# Altium PCB MK2.PcbDoc (part 1 of 7)
Units mil, origin at the board's own origin, x right, y up, seen from the top; angles counter-clockwise.
Board outline 3950 x 3965 mil, 2 copper layers (Top Layer, Bottom Layer); 19 components, 37 nets, 113 pads, 8 vias.
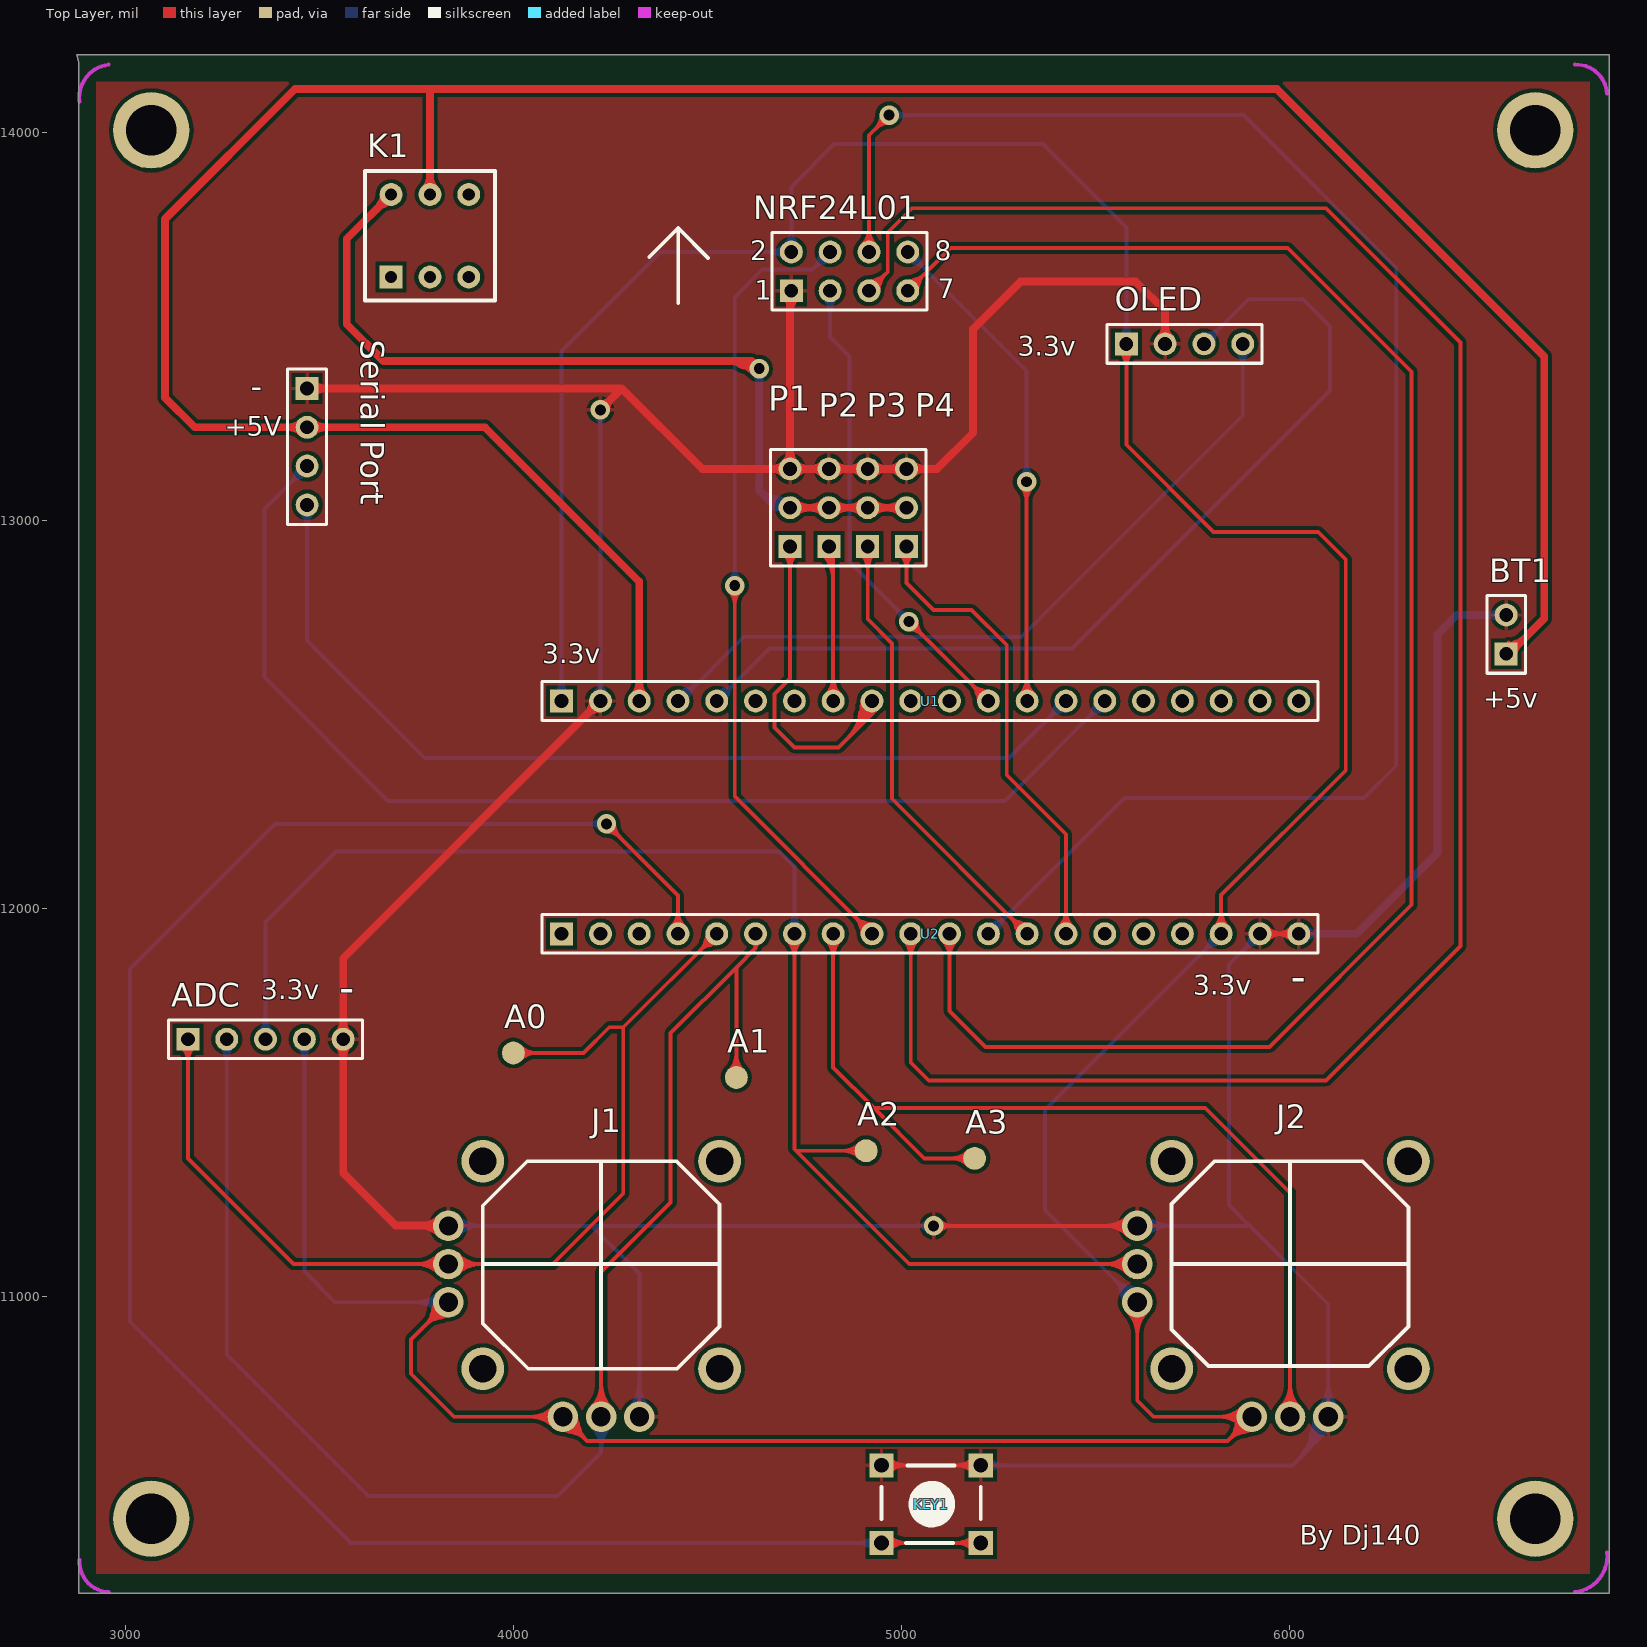
[diagram p0: Top Layer view]
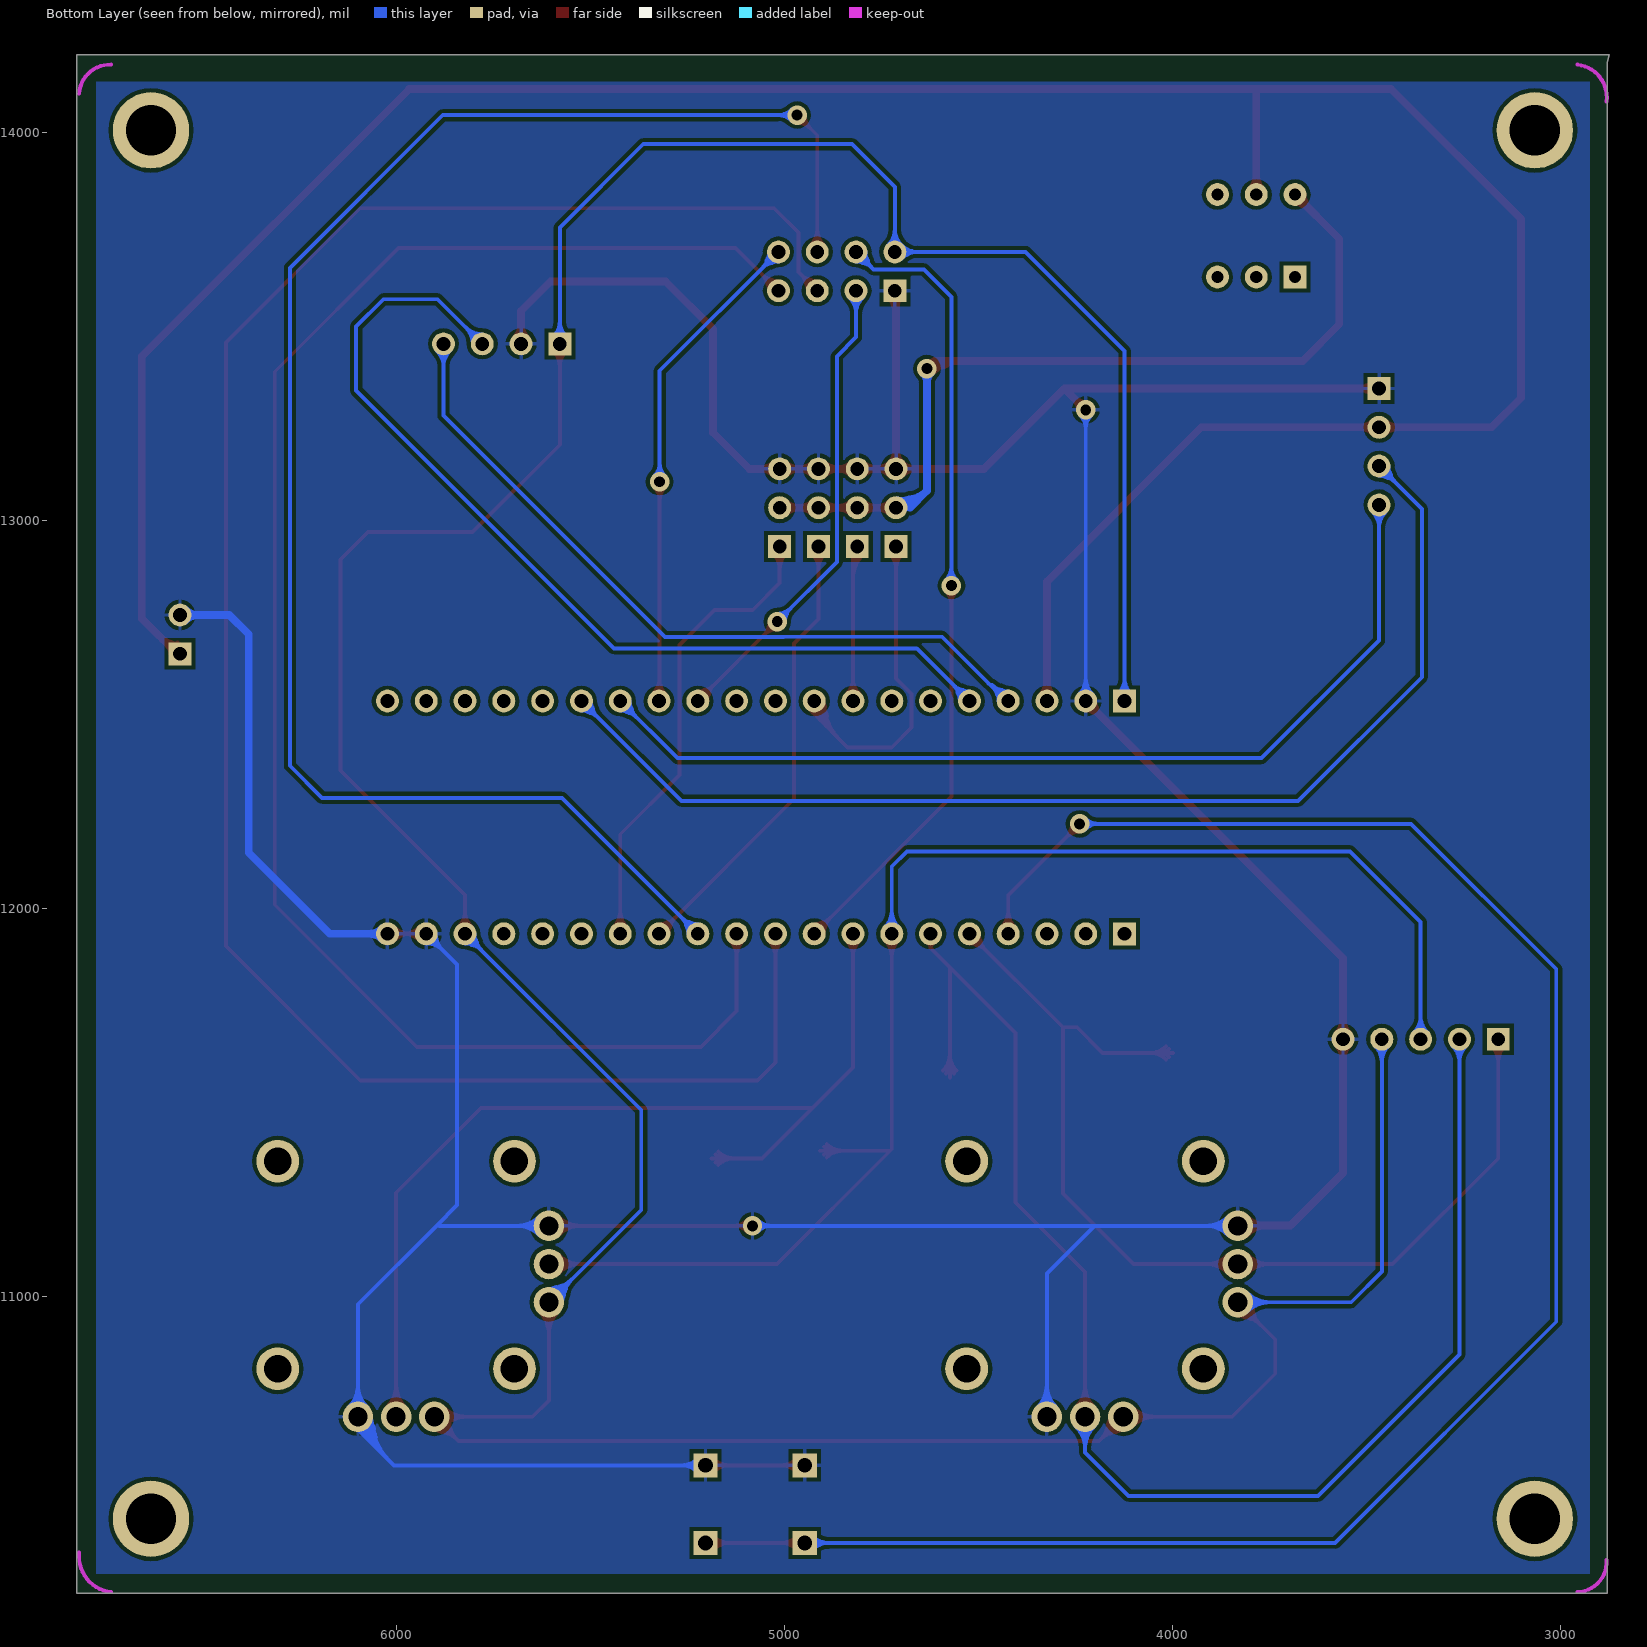
[diagram p1: Bottom Layer view, seen from below]

## Layer stack, top to bottom
Top Layer: signal copper 1.4
Dielectric: dielectric 12.6, FR-4, Dk 4.8
Bottom Layer: signal copper 1.4

## Board outline
2880,14180 2880,10235 6825,10235 6825,14200 2875,14200

## Design rules (kind name [scope] priority, off if disabled: settings)
Clearance [All] p1: gap=10
HoleSize [All] p1: absolutevalues=TRUE maxlimit=500 minlimit=1 maxpercent=80.000 minpercent=20.000
PolygonConnect [All] p1: connectstyle=Relief reliefconductorwidth=10 reliefentries=4 polygonreliefangle="90 Angle"
RoutingVias [All] p1: holewidth=28 width=50 viastyle="Through Hole" minholewidth=28 minwidth=50 maxholewidth=28 maxwidth=50
SilkscreenOverComponentPads [All] p1: minsilkscreentomaskgap=10
SolderMaskExpansion [All] p1: expansion=4
Width [All] p1: maxlimit=20 minlimit=10 preferedwidth=10
26 further rules are at their usual default settings.

## Components (designator, comment, footprint, x,y, rotation, side; value= is the part's Value field where it differs from the comment)
A0 "TEST POINT" TP-1.5 4000.04,11627.36 r0 top
A1 "TEST POINT" TP-1.5 4574.84,11564.37 r90 top
A2 "TEST POINT" TP-1.5 4909.49,11375.39 r90 top
A3 "TEST POINT" TP-1.5 5189.02,11355.71 r90 top
ADC "Header 5" HDR1X5 3161.46,11662.8 r0 top (schematic designator P8)
BT1 "VBAT" BAT-2 6559.09,12706.1 r90 top
J1 "油门摇杆" 摇杆2 4291.38,11253.35 r270 top
J2 "方向摇杆" 摇杆2 6066.97,11253.35 r270 top
K1 "BUTTON" BTN8.5*8.5 3685.08,13627.36 r90 top
KEY1 "KEY_L" KEY_M 4948.86,10564.37 r0 top
NRF24L01 "Header 4X2" HDR2X4 4716.57,13591.93 r0 top (schematic designator P7)
OLED "Header 4" HDR1X4 5580,13455 r0 top (schematic designator P10)
P1 "Header 3" HDR1X3 4713.43,12932.8 r90 top
P2 "Header 3" HDR1X3 4813.43,12932.8 r90 top
P3 "Header 3" HDR1X3 4913.43,12932.8 r90 top
P4 "Header 3" HDR1X3 5013.43,12932.8 r90 top
"Serial Port" "Header 4" HDR1X4 3468.54,13339.96 r270 top (schematic designator P9)
U1 "Header 20" HDR1X20 4124.45,12534.45 r0 top
U2 "Header 20" HDR1X20 4124.45,11934.45 r0 top locked

## Footprints (in the part's own frame and the unit in brackets; to place one, negate y for a bottom-side part, rotate by r counter-clockwise, add the part's x,y. Pads: shape width x height; smd on the part's side, far side on the other; paste and mask are expansions set on the pad)
BAT-2 [mm]
  rect 1.5x1.5 hole 0.9: 1(-1.27,0)
  round 1.5 hole 0.9: 2(1.27,0)
  silkscreen extent -2.54,-1.27 2.54,1.27
BTN8.5*8.5 [mm]
  rect 1.5x1.5 hole 0.8: 1(0,0)
  round 1.5 hole 0.8: 2(0,-2.54) 3(0,-5.08) 4(5.4,-5.08) 5(5.4,-2.54) 6(5.4,0)
  silkscreen extent -1.55,-6.79 6.95,1.71
HDR1X3 [mm] "Connector; Header; 3 Position"
  rect 1.5x1.5 hole 0.9: 1(0,0)
  round 1.5 hole 0.9: 2(2.54,0) 3(5.08,0)
  silkscreen extent -1.27,-1.27 6.35,1.27
HDR1X4 [mm] "Connector; Header; 4 Position"
  rect 1.5x1.5 hole 0.9: 1(0,0)
  round 1.5 hole 0.9: 2(2.54,0) 3(5.08,0) 4(7.62,0)
  silkscreen extent -1.27,-1.27 8.89,1.27
HDR1X5 [mm] "Connector; Header; 5 Position"
  rect 1.5x1.5 hole 0.9: 1(0,0)
  round 1.5 hole 0.9: 2(2.54,0) 3(5.08,0) 4(7.62,0) 5(10.16,0)
  silkscreen extent -1.27,-1.27 11.43,1.27
HDR1X20 [mm] "Connector; Header; 20 Position"
  rect 1.5x1.5 hole 0.9: 1(0,0)
  round 1.5 hole 0.9: 2(2.54,0) 3(5.08,0) 4(7.62,0) 5(10.16,0) 6(12.7,0) 7(15.24,0) 8(17.78,0) 9(20.32,0) 10(22.86,0) 11(25.4,0) 12(27.94,0) 13(30.48,0) 14(33.02,0) 15(35.56,0) 16(38.1,0) 17(40.64,0) 18(43.18,0) 19(45.72,0) 20(48.26,0)
  silkscreen extent -1.27,-1.27 49.53,1.27
HDR2X4 [mm] "Connector; Header; 4x2 Position"
  rect 1.5x1.5 hole 0.9: 1(0,0)
  round 1.5 hole 0.9: 2(0,2.54) 3(2.54,0) 4(2.54,2.54) 5(5.08,0) 6(5.08,2.54) 7(7.62,0) 8(7.62,2.54)
  silkscreen extent -1.27,-1.27 8.89,3.81
KEY_M [mil]
  rect 62x62 hole 38: 1(0,0) 1(255.91,0) 2(0,-200) 2(255.91,-200)
  silkscreen extent 0,-200 256,0
TP-1.5 [mm]
  round 1.5 smd: 1(0,0)
摇杆2 [mm]
  round 2.8 hole 1.8: 0(-2.413,6.102) 0(-2.413,-9.398) 0(11.176,6.102) 0(11.176,-9.398)
  round 2 hole 1.25: 1(14.318,0.849) 2(14.318,-1.651) 3(14.318,-4.151) 4(6.818,-11.651) 5(4.318,-11.651) 6(1.818,-11.651)
  silkscreen extent -2.41,-9.4 11.18,6.1

## Part data
A0 A1 A2 A3: library part TEST-POINT
ADC: "Header, 5-Pin"
BT1: library part Battery, "Multicell Battery"
J1: library part 摇杆
J2: library part 摇杆_1
KEY1: library part KEY
NRF24L01: "Header, 4-Pin, Dual row"
OLED "Serial Port": "Header, 4-Pin"
P1 P2 P3 P4: "Header, 3-Pin"
U1 U2: "Header, 20-Pin"

## Free pads (board coordinates)
  round 196.85 hole 129.92: 0(3066.97,10426.57) 0(3066.97,14005.32) 0(6633.9,10426.57) 0(6633.9,14005.32)

## Via types
v1: diameter 50, hole 28, Top Layer to Bottom Layer, 8 vias